# EAGLE board shift controller order (EAGLE 9.2.2), part 1 of 2
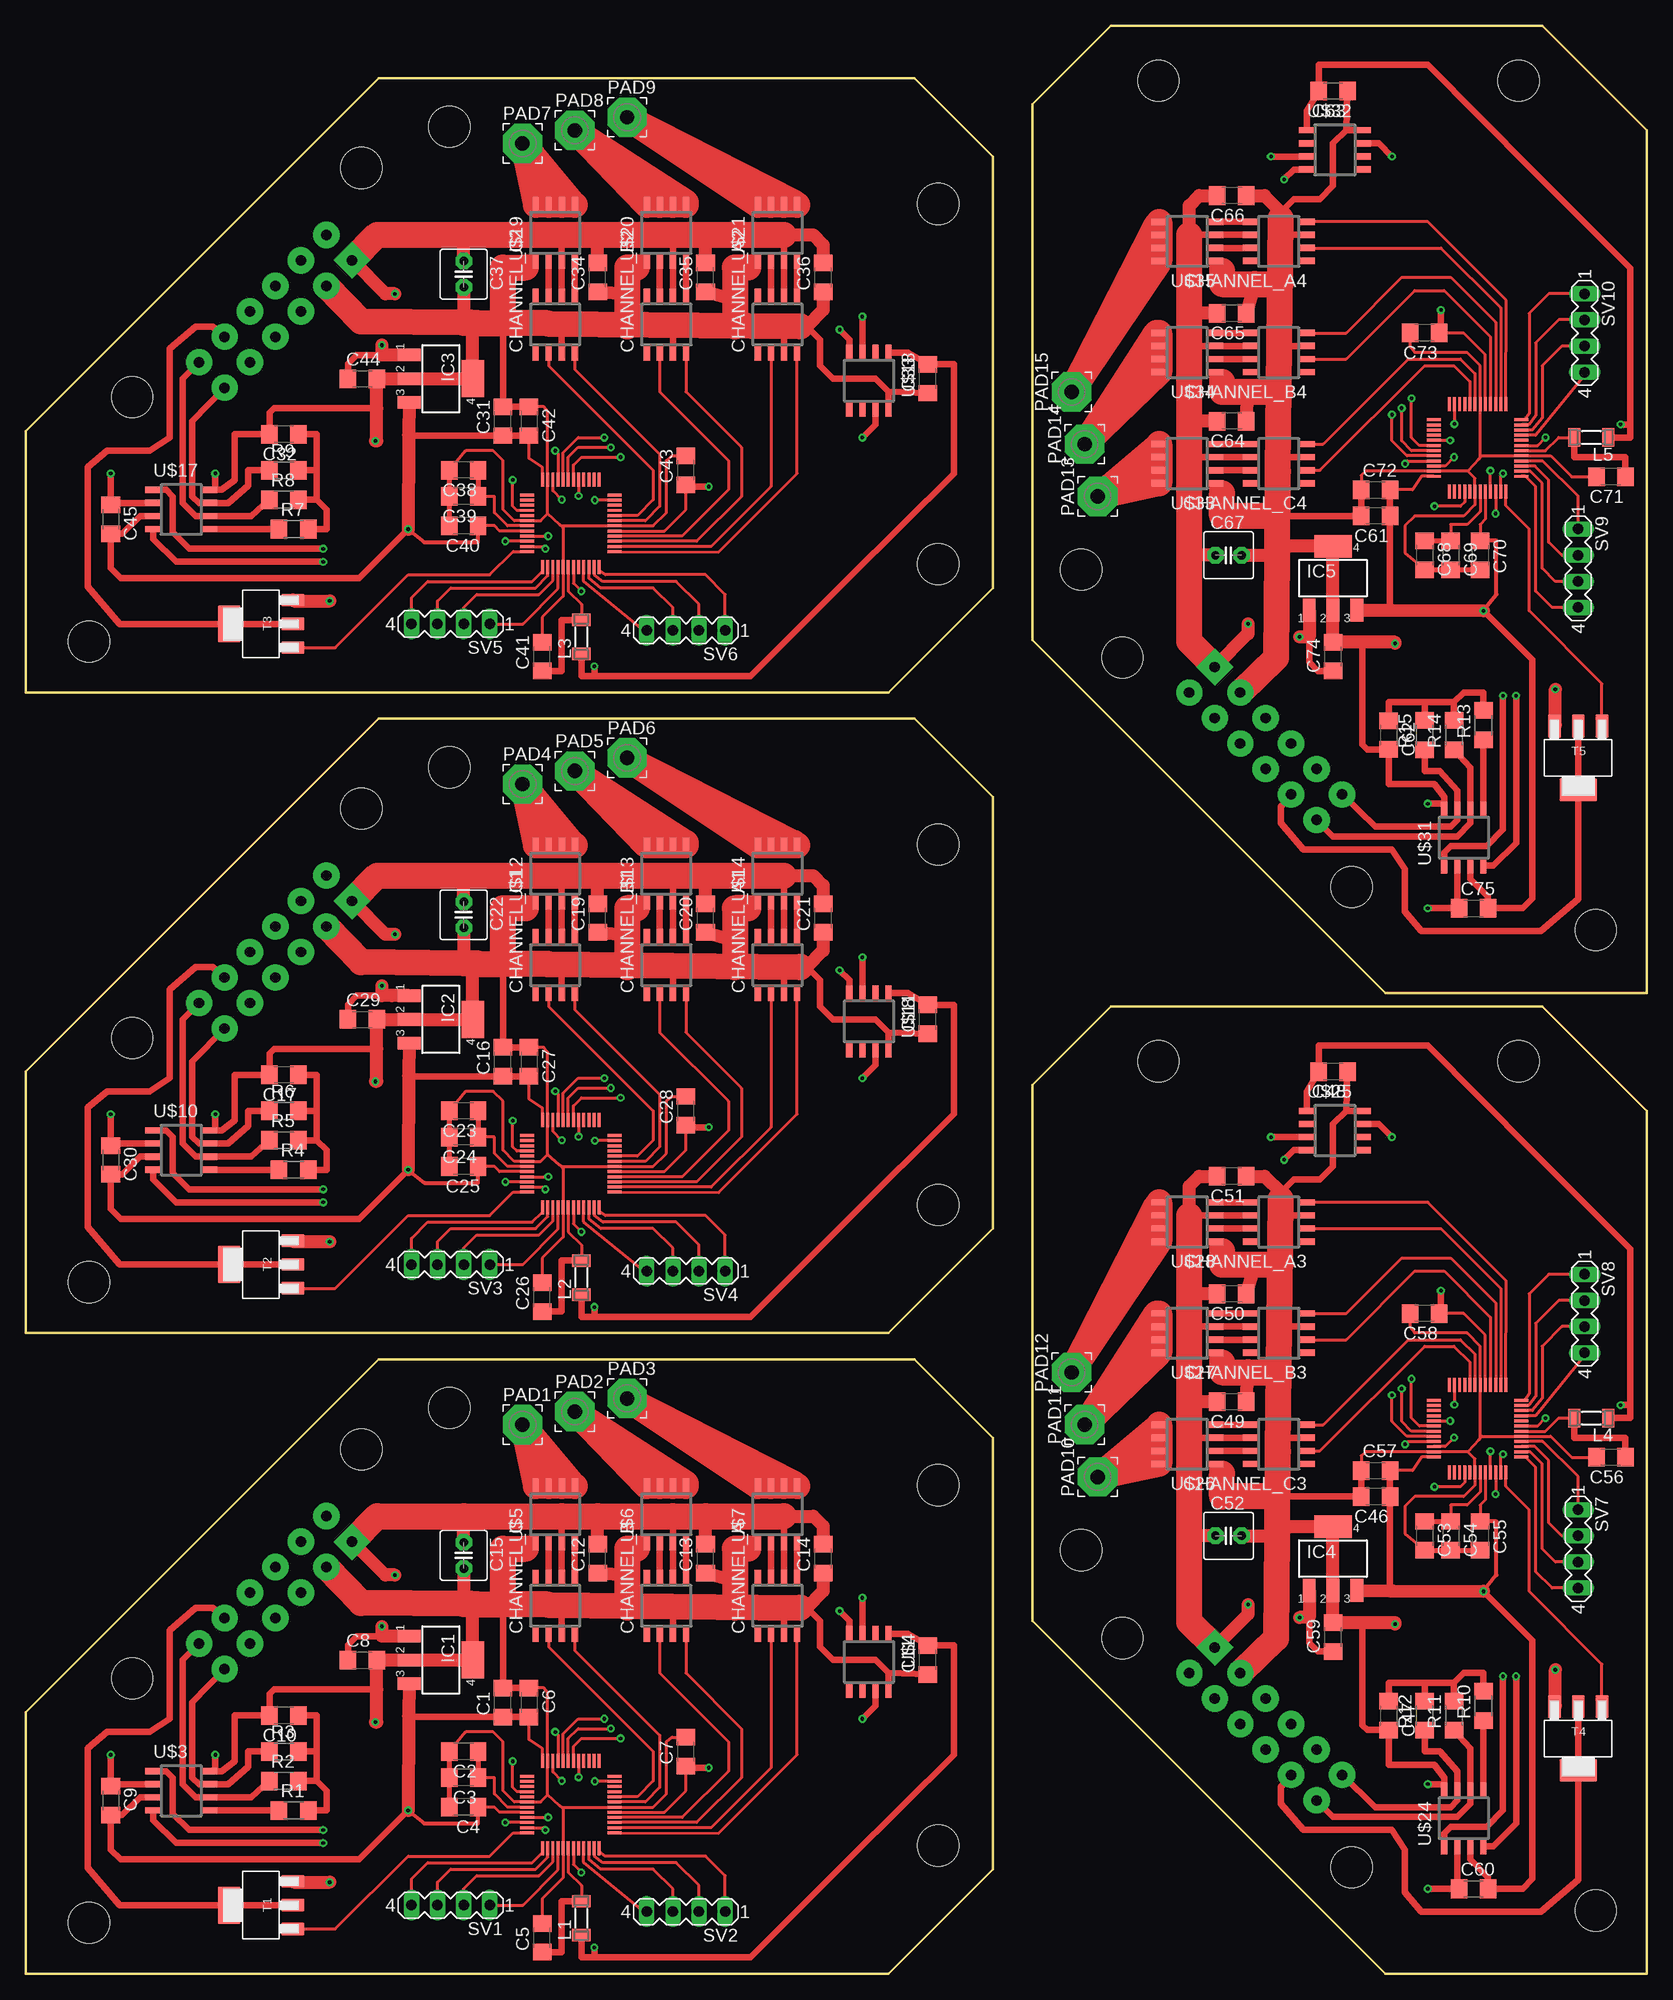
[diagram p0: board, top side]
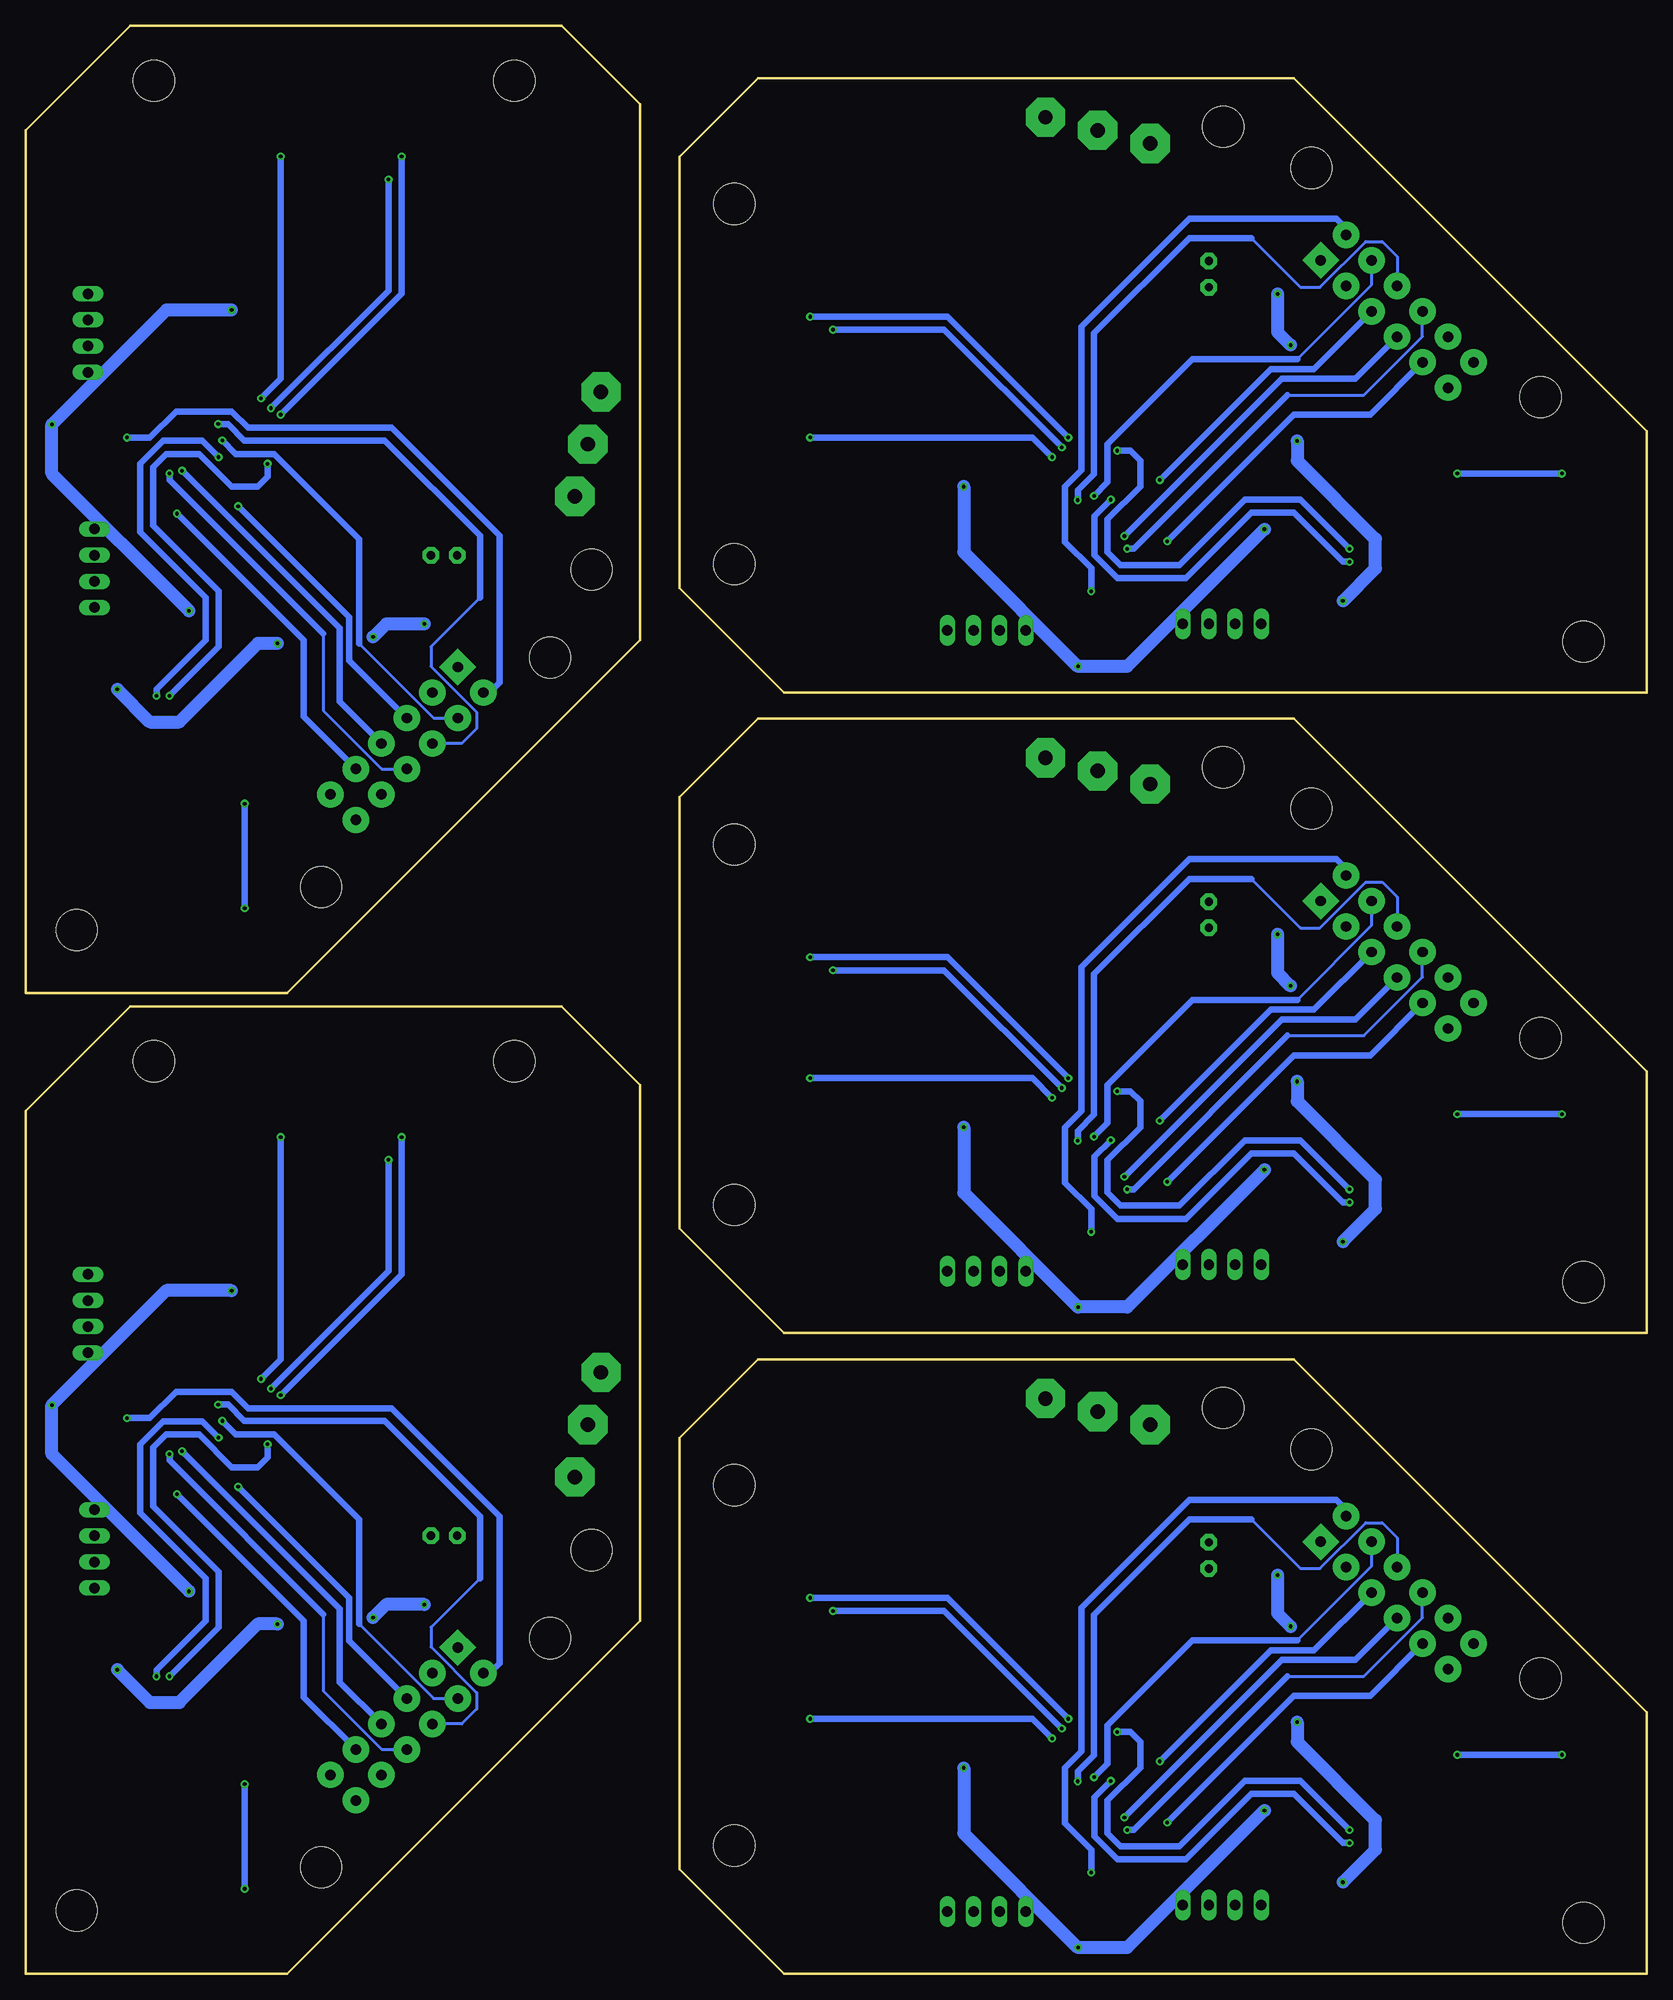
[diagram p1: board, bottom side, seen from below]

Size 157.48 x 189.23 mm. Coordinates in mm from the lower left corner, seen from the top.
Outline: 0,0 83.82,0 93.98,10.16 93.98,52.07 86.36,59.69 34.29,59.69 0,25.4 0,0
Outline: 0,62.23 83.82,62.23 93.98,72.39 93.98,114.3 86.36,121.92 34.29,121.92 0,87.63 0,62.23
Outline: 0,124.46 83.82,124.46 93.98,134.62 93.98,176.53 86.36,184.15 34.29,184.15 0,149.86 0,124.46
Outline: 157.48,0 157.48,83.82 147.32,93.98 105.41,93.98 97.79,86.36 97.79,34.29 132.08,0 157.48,0
Outline: 157.48,95.25 157.48,179.07 147.32,189.23 105.41,189.23 97.79,181.61 97.79,129.54 132.08,95.25 157.48,95.25
Copper layers (1*16): Top 0.035mm / dielectric 1.5mm / Bottom 0.035mm
Design rules "default": minimum track width 6mil, minimum drill 0.35mm, track to track 6mil, track to pad 6mil, pad to pad 6mil, via to via 6mil, smd to smd 6mil, copper to edge 40mil, drill to drill 6mil, minimum pad ring 10mil, minimum via ring 8mil, stop-mask expansion 4mil, vias tented up to drill 0mil, thermal gap 10mil
Holes 4 mm at 88.65,47.46 88.65,12.46 41.15,54.96 6.15,4.96 88.65,109.69 88.65,74.69 41.15,117.19 6.15,67.19 88.65,171.92 88.65,136.92 41.15,179.42 6.15,129.42 110.02,88.65 145.02,88.65 102.52,41.15 152.52,6.15 110.02,183.9 145.02,183.9 102.52,136.4 152.52,101.4
tRestrict: 5 lines

## Footprints (pad centres in the part's own frame; a part is rotated, then mirrored left to right if it is on the bottom)
C1206 = smd 1.6 x 1.8: 1 -1.4,0; 2 1.4,0
C2.5-5 = drill 0.813 pad 1.6 octagon: 1 -1.27,0; 2 1.27,0
SOIC-8 = smd 1.524 x 0.61: 1 0,3.81; 2 0,2.54; 3 0,1.27; 4 0,0; 5 5.461,0; 6 5.461,1.27; 7 5.461,2.54; 8 5.461,3.81
SOT223 = smd 1.219 x 2.235: 1 -2.311,-3.099; 2 0,-3.099; 3 2.311,-3.099 | smd 3.6 x 2.2: 4 0,3.099
SM-1206 = smd 1.2 x 1.8: 1 -1.65,0; 2 1.65,0
3,81/1,4 = drill 1.397 pad 3.81 octagon: 1 0,0
R1206 = smd 1.6 x 1.803: 1 -1.422,0; 2 1.422,0
MA04-1 = drill 1.016 long: 1 -3.81,0; 2 -1.27,0; 3 1.27,0; 4 3.81,0
SOT223' = smd 2.235 x 1.219: 1 -3.099,2.311; 2 -3.099,0; 3 -3.099,-2.311 | smd 2.2 x 3.6: 4 3.099,0
TQFP-48 = smd 1.35 x 0.29: 1 -4,2.5; 2 -4,2; 3 -4,1.5; 4 -4,1; 5 -4,0.5; 6 -4,0; 7 -4,-0.5; 8 -4,-1; 9 -4,-1.5; 10 -4,-2; 11 -4,-2.5; 12 -4,-3; 25 4.5,-3; 26 4.5,-2.5; 27 4.5,-2; 28 4.5,-1.5; 29 4.5,-1; 30 4.5,-0.5; 31 4.5,0; 32 4.5,0.5; 33 4.5,1; 34 4.5,1.5; 35 4.5,2; 36 4.5,2.5 | smd 0.29 x 1.35: 13 -2.5,-4.5; 14 -2,-4.5; 15 -1.5,-4.5; 16 -1,-4.5; 17 -0.5,-4.5; 18 0,-4.5; 19 0.5,-4.5; 20 1,-4.5; 21 1.5,-4.5; 22 2,-4.5; 23 2.5,-4.5; 24 3,-4.5; 37 3,4; 38 2.5,4; 39 2,4; 40 1.5,4; 41 1,4; 42 0.5,4; 43 0,4; 44 -0.5,4; 45 -1,4; 46 -1.5,4; 47 -2,4; 48 -2.5,4
12X3.5PITCH = drill 1 pad 2.54 square: 1 0,3.5 | drill 1 pad 2.54: 2 3.5,3.5; 3 7,3.5; 4 10.5,3.5; 5 14,3.5; 6 17.5,3.5; 7 0,0; 8 3.5,0; 9 7,0; 10 10.5,0; 11 14,0; 12 17.5,0 | hole 3.988: -7,-2.2; 24.5,-2.2

## Placement (x,y rotation side)
C1  10uF  [C1206]  46.35,26.35 90 top
C2  1uF  [C1206]  42.55,21.59 180 top
C3  100nF  [C1206]  42.55,19.05 180 top
C4  100nF  [C1206]  42.55,16.19 180 top
C5  10uF  [C1206]  50.16,3.49 90 top
C6  100nF  [C1206]  48.9,26.35 270 top
C7  100nF  [C1206]  64.14,21.59 90 top
C8  0.22uF  [C1206]  32.7,30.48 0 top
C9  0.1uF  [C1206]  8.26,16.83 270 top
C10  4700pF  [C1206]  25.08,25.08 180 top
C11  100nF  [C1206]  87.63,30.48 90 top
C12  0.5uF  [C1206]  55.56,40.32 90 top
C13  0.5uF  [C1206]  66.04,40.32 90 top
C14  0.5uF  [C1206]  77.47,40.32 90 top
C15  100uF  [C2.5-5]  42.55,40.64 270 top
C16  10uF  [C1206]  46.35,88.58 90 top
C17  4700pF  [C1206]  25.08,87.31 180 top
C18  100nF  [C1206]  87.63,92.71 90 top
C19  0.5uF  [C1206]  55.56,102.55 90 top
C20  0.5uF  [C1206]  66.04,102.55 90 top
C21  0.5uF  [C1206]  77.47,102.55 90 top
C22  100uF  [C2.5-5]  42.55,102.87 270 top
C23  1uF  [C1206]  42.55,83.82 180 top
C24  100nF  [C1206]  42.55,81.28 180 top
C25  100nF  [C1206]  42.55,78.42 180 top
C26  10uF  [C1206]  50.16,65.72 90 top
C27  100nF  [C1206]  48.9,88.58 270 top
C28  100nF  [C1206]  64.14,83.82 90 top
C29  0.22uF  [C1206]  32.7,92.71 0 top
C30  0.1uF  [C1206]  8.26,79.06 270 top
C31  10uF  [C1206]  46.35,150.81 90 top
C32  4700pF  [C1206]  25.08,149.54 180 top
C33  100nF  [C1206]  87.63,154.94 90 top
C34  0.5uF  [C1206]  55.56,164.78 90 top
C35  0.5uF  [C1206]  66.04,164.78 90 top
C36  0.5uF  [C1206]  77.47,164.78 90 top
C37  100uF  [C2.5-5]  42.55,165.1 270 top
C38  1uF  [C1206]  42.55,146.05 180 top
C39  100nF  [C1206]  42.55,143.51 180 top
C40  100nF  [C1206]  42.55,140.65 180 top
C41  10uF  [C1206]  50.16,127.95 90 top
C42  100nF  [C1206]  48.9,150.81 270 top
C43  100nF  [C1206]  64.14,146.05 90 top
C44  0.22uF  [C1206]  32.7,154.94 0 top
C45  0.1uF  [C1206]  8.26,141.29 270 top
C46  10uF  [C1206]  131.13,46.35 180 top
C47  4700pF  [C1206]  132.4,25.08 270 top
C48  100nF  [C1206]  127,87.63 180 top
C49  0.5uF  [C1206]  117.16,55.56 180 top
C50  0.5uF  [C1206]  117.16,66.04 180 top
C51  0.5uF  [C1206]  117.16,77.47 180 top
C52  100uF  [C2.5-5]  116.84,42.55 0 top
C53  1uF  [C1206]  135.89,42.55 270 top
C54  100nF  [C1206]  138.43,42.55 270 top
C55  100nF  [C1206]  141.29,42.55 270 top
C56  10uF  [C1206]  153.99,50.16 180 top
C57  100nF  [C1206]  131.13,48.9 0 top
C58  100nF  [C1206]  135.89,64.14 180 top
C59  0.22uF  [C1206]  127,32.7 90 top
C60  0.1uF  [C1206]  140.65,8.26 0 top
C61  10uF  [C1206]  131.13,141.6 180 top
C62  4700pF  [C1206]  132.4,120.33 270 top
C63  100nF  [C1206]  127,182.88 180 top
C64  0.5uF  [C1206]  117.16,150.81 180 top
C65  0.5uF  [C1206]  117.16,161.29 180 top
C66  0.5uF  [C1206]  117.16,172.72 180 top
C67  100uF  [C2.5-5]  116.84,137.79 0 top
C68  1uF  [C1206]  135.89,137.79 270 top
C69  100nF  [C1206]  138.43,137.79 270 top
C70  100nF  [C1206]  141.29,137.79 270 top
C71  10uF  [C1206]  153.99,145.41 180 top
C72  100nF  [C1206]  131.13,144.15 0 top
C73  100nF  [C1206]  135.89,159.38 180 top
C74  0.22uF  [C1206]  127,127.95 90 top
C75  0.1uF  [C1206]  140.65,103.5 0 top
CHANNEL_A  FAN3278  [SOIC-8]  74.93,33.02 90 top
CHANNEL_A1  FAN3278  [SOIC-8]  74.93,95.25 90 top
CHANNEL_A2  FAN3278  [SOIC-8]  74.93,157.48 90 top
CHANNEL_A3  FAN3278  [SOIC-8]  124.46,74.93 180 top
CHANNEL_A4  FAN3278  [SOIC-8]  124.46,170.18 180 top
CHANNEL_B  FAN3278  [SOIC-8]  64.14,33.02 90 top
CHANNEL_B1  FAN3278  [SOIC-8]  64.14,95.25 90 top
CHANNEL_B2  FAN3278  [SOIC-8]  64.14,157.48 90 top
CHANNEL_B3  FAN3278  [SOIC-8]  124.46,64.14 180 top
CHANNEL_B4  FAN3278  [SOIC-8]  124.46,159.38 180 top
CHANNEL_C  FAN3278  [SOIC-8]  53.34,33.02 90 top
CHANNEL_C1  FAN3278  [SOIC-8]  53.34,95.25 90 top
CHANNEL_C2  FAN3278  [SOIC-8]  53.34,157.48 90 top
CHANNEL_C3  FAN3278  [SOIC-8]  124.46,53.34 180 top
CHANNEL_C4  FAN3278  [SOIC-8]  124.46,148.59 180 top
IC1  LM340S  [SOT223]  40.32,30.48 270 top
IC2  LM340S  [SOT223]  40.32,92.71 270 top
IC3  LM340S  [SOT223]  40.32,154.94 270 top
IC4  LM340S  [SOT223]  127,40.32 0 top
IC5  LM340S  [SOT223]  127,135.57 0 top
L1  [SM-1206]  53.98,5.4 90 top
L2  [SM-1206]  53.98,67.63 90 top
L3  [SM-1206]  53.98,129.86 90 top
L4  [SM-1206]  152.08,53.98 180 top
L5  [SM-1206]  152.08,149.22 180 top
PAD1  [3,81/1,4]  48.26,53.34 0 top
PAD2  [3,81/1,4]  53.34,54.61 0 top
PAD3  [3,81/1,4]  58.42,55.88 0 top
PAD4  [3,81/1,4]  48.26,115.57 0 top
PAD5  [3,81/1,4]  53.34,116.84 0 top
PAD6  [3,81/1,4]  58.42,118.11 0 top
PAD7  [3,81/1,4]  48.26,177.8 0 top
PAD8  [3,81/1,4]  53.34,179.07 0 top
PAD9  [3,81/1,4]  58.42,180.34 0 top
PAD10  [3,81/1,4]  104.14,48.26 90 top
PAD11  [3,81/1,4]  102.87,53.34 90 top
PAD12  [3,81/1,4]  101.6,58.42 90 top
PAD13  [3,81/1,4]  104.14,143.51 90 top
PAD14  [3,81/1,4]  102.87,148.59 90 top
PAD15  [3,81/1,4]  101.6,153.67 90 top
R1  300ohm  [R1206]  26.04,15.88 0 top
R2  60ohm  [R1206]  25.08,18.73 0 top
R3  60ohm  [R1206]  25.08,21.59 0 top
R4  300ohm  [R1206]  26.04,78.11 0 top
R5  60ohm  [R1206]  25.08,80.96 0 top
R6  60ohm  [R1206]  25.08,83.82 0 top
R7  300ohm  [R1206]  26.04,140.34 0 top
R8  60ohm  [R1206]  25.08,143.19 0 top
R9  60ohm  [R1206]  25.08,146.05 0 top
R10  300ohm  [R1206]  141.6,26.04 90 top
R11  60ohm  [R1206]  138.75,25.08 90 top
R12  60ohm  [R1206]  135.89,25.08 90 top
R13  300ohm  [R1206]  141.6,121.28 90 top
R14  60ohm  [R1206]  138.75,120.33 90 top
R15  60ohm  [R1206]  135.89,120.33 90 top
SV1  [MA04-1]  41.27,6.67 180 top
SV2  [MA04-1]  64.14,6.03 180 top
SV3  [MA04-1]  41.27,68.9 180 top
SV4  [MA04-1]  64.14,68.26 180 top
SV5  [MA04-1]  41.27,131.13 180 top
SV6  [MA04-1]  64.14,130.49 180 top
SV7  [MA04-1]  150.81,41.27 270 top
SV8  [MA04-1]  151.45,64.14 270 top
SV9  [MA04-1]  150.81,136.53 270 top
SV10  [MA04-1]  151.45,159.38 270 top
T1  [SOT223']  22.86,6.67 180 top
T2  [SOT223']  22.86,68.9 180 top
T3  [SOT223']  22.86,131.13 180 top
T4  [SOT223']  150.81,22.86 270 top
T5  [SOT223']  150.81,118.11 270 top
U$1  SAMC21(48TQFP)  [TQFP-48]  52.7,16.19 90 top
U$2  MX120SHIFT  [12X3.5PITCH]  29.21,44.45 225 top
U$3  MCP2561FD  [SOIC-8]  12.38,15.88 0 top
U$4  AK7401  [SOIC-8]  80.01,33.02 270 top
U$5  SI4501BDY  [SOIC-8]  53.34,41.91 90 top
U$6  SI4501BDY  [SOIC-8]  64.14,41.91 90 top
U$7  SI4501BDY  [SOIC-8]  74.93,41.91 90 top
U$8  SAMC21(48TQFP)  [TQFP-48]  52.7,78.42 90 top
U$9  MX120SHIFT  [12X3.5PITCH]  29.21,106.68 225 top
U$10  MCP2561FD  [SOIC-8]  12.38,78.11 0 top
U$11  AK7401  [SOIC-8]  80.01,95.25 270 top
U$12  SI4501BDY  [SOIC-8]  53.34,104.14 90 top
U$13  SI4501BDY  [SOIC-8]  64.14,104.14 90 top
U$14  SI4501BDY  [SOIC-8]  74.93,104.14 90 top
U$15  SAMC21(48TQFP)  [TQFP-48]  52.7,140.65 90 top
U$16  MX120SHIFT  [12X3.5PITCH]  29.21,168.91 225 top
U$17  MCP2561FD  [SOIC-8]  12.38,140.34 0 top
U$18  AK7401  [SOIC-8]  80.01,157.48 270 top
U$19  SI4501BDY  [SOIC-8]  53.34,166.37 90 top
U$20  SI4501BDY  [SOIC-8]  64.14,166.37 90 top
U$21  SI4501BDY  [SOIC-8]  74.93,166.37 90 top
U$22  SAMC21(48TQFP)  [TQFP-48]  141.29,52.7 180 top
U$23  MX120SHIFT  [12X3.5PITCH]  113.03,29.21 315 top
U$24  MCP2561FD  [SOIC-8]  141.6,12.38 90 top
U$25  AK7401  [SOIC-8]  124.46,80.01 0 top
U$26  SI4501BDY  [SOIC-8]  115.57,53.34 180 top
U$27  SI4501BDY  [SOIC-8]  115.57,64.14 180 top
U$28  SI4501BDY  [SOIC-8]  115.57,74.93 180 top
U$29  SAMC21(48TQFP)  [TQFP-48]  141.29,147.96 180 top
U$30  MX120SHIFT  [12X3.5PITCH]  113.03,124.46 315 top
U$31  MCP2561FD  [SOIC-8]  141.6,107.63 90 top
U$32  AK7401  [SOIC-8]  124.46,175.26 0 top
U$33  SI4501BDY  [SOIC-8]  115.57,148.59 180 top
U$34  SI4501BDY  [SOIC-8]  115.57,159.38 180 top
U$35  SI4501BDY  [SOIC-8]  115.57,170.18 180 top

## Library data of the parts
C1-C14 C16-C21 C23-C36 C38-C51 C53-C66 C68-C75 = eagle-ltspice; SPICEMODEL: NONE; SPICEPREFIX: C
C15 C22 C37 C52 C67 = capacitor-wima
CHANNEL_A CHANNEL_A1-CHANNEL_A4 CHANNEL_B CHANNEL_B1-CHANNEL_B4 CHANNEL_C CHANNEL_C1-CHANNEL_C4 U$2 U$4-U$7 U$9 U$11-U$14 U$16 U$18-U$21 U$23 U$25-U$28 U$30 U$32-U$35 = my library 2
IC1-IC5 = linear
L1-L5 = inductor-neosid; OC_FARNELL: unknown; OC_NEWARK: unknown
PAD1-PAD15 = wirepad
R1-R15 = eagle-ltspice; SPICEMODEL: NONE; SPICEPREFIX: R
SV1-SV10 = con-lstb; OC_FARNELL: unknown; OC_NEWARK: unknown
T1-T5 = we-transistor
U$1 U$3 U$8 U$10 U$15 U$17 U$22 U$24 U$29 U$31 = my library

## Nets
N$1: U$1.45 U$2.4
N$2: U$1.46 U$2.5
N$3: U$1.34 U$3.4
N$4: U$1.33 U$3.1
N$5: R3.1 U$2.6 U$3.7
N$6: R2.1 U$2.12 U$3.6
N$7: U$1.40 U$2.3
N$8: U$1.7 U$2.7
N$9: U$1.23 U$2.9
N$10: U$1.29 U$2.8
N$11: SV1.4 U$1.1
N$12: C8.1 C12.2 C13.2 C14.2 C15.1 CHANNEL_A.6 CHANNEL_B.6 CHANNEL_C.6 IC1.1 U$2.1 U$5.3 U$6.3 U$7.3
N$13: C1.1 C4.1 C6.2 C7.1 C9.2 C11.2 IC1.3 L1.1 U$1.17 U$1.36 U$1.44 U$3.3 U$4.1
N$14: C2.1 C3.1 U$1.43
N$15: C5.1 L1.2 U$1.6
N$16: R1.1 U$3.5
N$18: C10.1 R1.2 R2.2 R3.2
N$19: CHANNEL_C.2 U$1.20
N$20: U$1.30 U$4.7
N$21: U$1.31 U$4.4
N$22: U$1.32 U$4.3
N$23: T1.2 T1.4 U$2.11
N$24: T1.1 U$1.48
N$25: PAD1.1 U$5.5 U$5.6 U$5.7 U$5.8
N$26: PAD2.1 U$6.5 U$6.6 U$6.7 U$6.8
N$27: PAD3.1 U$7.5 U$7.6 U$7.7 U$7.8
N$28: CHANNEL_C.4 U$1.19
N$29: CHANNEL_C.7 U$5.2
N$30: CHANNEL_C.5 U$5.4
N$31: CHANNEL_B.7 U$6.2
N$32: CHANNEL_B.5 U$6.4
N$33: CHANNEL_A.7 U$7.2
N$34: CHANNEL_A.5 U$7.4
N$35: C1.2 C2.2 C3.2 C4.2 C5.2 C6.1 C7.2 C8.2 C9.1 C10.2 C11.1 C12.1 C13.1 C14.1 C15.2 CHANNEL_A.3 CHANNEL_B.3 CHANNEL_C.3 IC1.2 IC1.4 T1.3 U$1.5 U$1.18 U$1.35 U$1.42 U$2.2 U$3.2 U$3.8 U$4.8 U$5.1 U$6.1 U$7.1
N$36: CHANNEL_B.2 U$1.16
N$37: CHANNEL_B.4 U$1.15
N$38: CHANNEL_A.2 U$1.14
N$39: CHANNEL_A.4 U$1.13
N$40: U$1.47 U$2.10
N$41: SV1.3 U$1.2
N$42: SV1.2 U$1.3
N$43: SV1.1 U$1.4
N$44: SV2.4 U$1.9
N$45: SV2.3 U$1.10
N$46: SV2.2 U$1.11
N$47: SV2.1 U$1.12
N$48: U$8.45 U$9.4
N$51: U$8.46 U$9.5
N$52: U$8.33 U$10.1
N$53: R6.1 U$9.6 U$10.7
N$54: R5.1 U$9.12 U$10.6
N$55: U$8.40 U$9.3
N$56: C16.1 C18.2 C25.1 C27.2 C28.1 C30.2 IC2.3 L2.1 U$8.17 U$8.36 U$8.44 U$10.3 U$11.1
N$57: C23.1 C24.1 U$8.43
N$58: C26.1 L2.2 U$8.6
N$59: U$8.34 U$10.4
N$60: R4.1 U$10.5
N$61: C17.1 R4.2 R5.2 R6.2
N$62: U$8.30 U$11.7
N$63: U$8.31 U$11.4
N$64: U$8.32 U$11.3
N$65: T2.2 T2.4 U$9.11
N$66: T2.1 U$8.48
N$67: PAD4.1 U$12.5 U$12.6 U$12.7 U$12.8
N$68: PAD5.1 U$13.5 U$13.6 U$13.7 U$13.8
N$69: PAD6.1 U$14.5 U$14.6 U$14.7 U$14.8
N$70: C19.2 C20.2 C21.2 C22.1 C29.1 CHANNEL_A1.6 CHANNEL_B1.6 CHANNEL_C1.6 IC2.1 U$9.1 U$12.3 U$13.3 U$14.3
N$71: CHANNEL_C1.7 U$12.2
N$72: CHANNEL_C1.5 U$12.4
N$73: CHANNEL_B1.7 U$13.2
N$74: CHANNEL_B1.5 U$13.4
N$75: CHANNEL_A1.7 U$14.2
N$76: CHANNEL_A1.5 U$14.4
N$77: CHANNEL_C1.2 U$8.20
N$78: CHANNEL_C1.4 U$8.19
N$79: CHANNEL_B1.2 U$8.16
N$80: CHANNEL_B1.4 U$8.15
N$81: CHANNEL_A1.2 U$8.14
N$82: CHANNEL_A1.4 U$8.13
N$83: U$8.7 U$9.7
N$84: U$8.23 U$9.9
N$85: U$8.29 U$9.8
N$86: U$8.47 U$9.10
N$87: SV3.4 U$8.1
N$88: SV3.3 U$8.2
N$89: SV3.2 U$8.3
N$90: SV3.1 U$8.4
N$91: SV4.4 U$8.9
N$92: SV4.3 U$8.10
N$93: SV4.2 U$8.11
N$94: SV4.1 U$8.12
N$97: C16.2 C17.2 C18.1 C19.1 C20.1 C21.1 C22.2 C23.2 C24.2 C25.2 C26.2 C27.1 C28.2 C29.2 C30.1 CHANNEL_A1.3 CHANNEL_B1.3 CHANNEL_C1.3 IC2.2 IC2.4 T2.3 U$8.5 U$8.18 U$8.35 U$8.42 U$9.2 U$10.2 U$10.8 U$11.8 U$12.1 U$13.1 U$14.1
N$99: U$15.45 U$16.4
N$100: U$15.46 U$16.5
N$101: U$15.33 U$17.1
N$102: R9.1 U$16.6 U$17.7
N$103: R8.1 U$16.12 U$17.6
N$104: U$15.40 U$16.3
N$105: C31.1 C33.2 C40.1 C42.2 C43.1 C45.2 IC3.3 L3.1 U$15.17 U$15.36 U$15.44 U$17.3 U$18.1
N$106: C38.1 C39.1 U$15.43
N$107: C41.1 L3.2 U$15.6
N$108: U$15.34 U$17.4
N$109: R7.1 U$17.5
N$110: C32.1 R7.2 R8.2 R9.2
N$111: U$15.30 U$18.7
N$112: U$15.31 U$18.4
N$113: U$15.32 U$18.3
N$114: T3.2 T3.4 U$16.11
N$115: T3.1 U$15.48
N$116: PAD7.1 U$19.5 U$19.6 U$19.7 U$19.8
N$117: PAD8.1 U$20.5 U$20.6 U$20.7 U$20.8
N$118: PAD9.1 U$21.5 U$21.6 U$21.7 U$21.8
N$119: C34.2 C35.2 C36.2 C37.1 C44.1 CHANNEL_A2.6 CHANNEL_B2.6 CHANNEL_C2.6 IC3.1 U$16.1 U$19.3 U$20.3 U$21.3
N$120: CHANNEL_C2.7 U$19.2
N$121: CHANNEL_C2.5 U$19.4
N$122: CHANNEL_B2.7 U$20.2
N$123: CHANNEL_B2.5 U$20.4
N$124: CHANNEL_A2.7 U$21.2
N$125: CHANNEL_A2.5 U$21.4
N$126: CHANNEL_C2.2 U$15.20
N$127: CHANNEL_C2.4 U$15.19
N$128: CHANNEL_B2.2 U$15.16
N$129: CHANNEL_B2.4 U$15.15
N$130: CHANNEL_A2.2 U$15.14
N$131: CHANNEL_A2.4 U$15.13
N$132: U$15.7 U$16.7
N$133: U$15.23 U$16.9
N$134: U$15.29 U$16.8
N$135: U$15.47 U$16.10
N$136: SV5.4 U$15.1
N$137: SV5.3 U$15.2
N$138: SV5.2 U$15.3
N$139: SV5.1 U$15.4
N$140: SV6.4 U$15.9
N$141: SV6.3 U$15.10
N$142: SV6.2 U$15.11
N$143: SV6.1 U$15.12
N$146: C31.2 C32.2 C33.1 C34.1 C35.1 C36.1 C37.2 C38.2 C39.2 C40.2 C41.2 C42.1 C43.2 C44.2 C45.1 CHANNEL_A2.3 CHANNEL_B2.3 CHANNEL_C2.3 IC3.2 IC3.4 T3.3 U$15.5 U$15.18 U$15.35 U$15.42 U$16.2 U$17.2 U$17.8 U$18.8 U$19.1 U$20.1 U$21.1
N$148: U$22.45 U$23.4
N$149: U$22.46 U$23.5
N$150: U$22.33 U$24.1
N$151: R12.1 U$23.6 U$24.7
N$152: R11.1 U$23.12 U$24.6
N$153: U$22.40 U$23.3
N$154: C46.1 C48.2 C55.1 C57.2 C58.1 C60.2 IC4.3 L4.1 U$22.17 U$22.36 U$22.44 U$24.3 U$25.1
N$155: C53.1 C54.1 U$22.43
N$156: C56.1 L4.2 U$22.6
N$157: U$22.34 U$24.4
N$158: R10.1 U$24.5
N$159: C47.1 R10.2 R11.2 R12.2
N$160: U$22.30 U$25.7
N$161: U$22.31 U$25.4
N$162: U$22.32 U$25.3
N$163: T4.2 T4.4 U$23.11
N$164: T4.1 U$22.48
N$165: PAD10.1 U$26.5 U$26.6 U$26.7 U$26.8
N$166: PAD11.1 U$27.5 U$27.6 U$27.7 U$27.8
N$167: PAD12.1 U$28.5 U$28.6 U$28.7 U$28.8
N$168: C49.2 C50.2 C51.2 C52.1 C59.1 CHANNEL_A3.6 CHANNEL_B3.6 CHANNEL_C3.6 IC4.1 U$23.1 U$26.3 U$27.3 U$28.3
N$169: CHANNEL_C3.7 U$26.2
N$170: CHANNEL_C3.5 U$26.4
N$171: CHANNEL_B3.7 U$27.2
N$172: CHANNEL_B3.5 U$27.4
N$173: CHANNEL_A3.7 U$28.2
N$174: CHANNEL_A3.5 U$28.4
N$175: CHANNEL_C3.2 U$22.20
N$176: CHANNEL_C3.4 U$22.19
N$177: CHANNEL_B3.2 U$22.16
N$178: CHANNEL_B3.4 U$22.15
N$179: CHANNEL_A3.2 U$22.14
N$180: CHANNEL_A3.4 U$22.13
N$181: U$22.7 U$23.7
N$182: U$22.23 U$23.9
N$183: U$22.29 U$23.8
N$184: U$22.47 U$23.10
N$185: SV7.4 U$22.1
N$186: SV7.3 U$22.2
N$187: SV7.2 U$22.3
N$188: SV7.1 U$22.4
N$189: SV8.4 U$22.9
N$190: SV8.3 U$22.10
N$191: SV8.2 U$22.11
N$192: SV8.1 U$22.12
N$195: C46.2 C47.2 C48.1 C49.1 C50.1 C51.1 C52.2 C53.2 C54.2 C55.2 C56.2 C57.1 C58.2 C59.2 C60.1 CHANNEL_A3.3 CHANNEL_B3.3 CHANNEL_C3.3 IC4.2 IC4.4 T4.3 U$22.5 U$22.18 U$22.35 U$22.42 U$23.2 U$24.2 U$24.8 U$25.8 U$26.1 U$27.1 U$28.1
N$197: U$29.45 U$30.4
N$198: U$29.46 U$30.5
N$199: U$29.33 U$31.1
N$200: R15.1 U$30.6 U$31.7
N$201: R14.1 U$30.12 U$31.6
N$202: U$29.40 U$30.3
N$203: C61.1 C63.2 C70.1 C72.2 C73.1 C75.2 IC5.3 L5.1 U$29.17 U$29.36 U$29.44 U$31.3 U$32.1
N$204: C68.1 C69.1 U$29.43
N$205: C71.1 L5.2 U$29.6
N$206: U$29.34 U$31.4
N$207: R13.1 U$31.5
N$208: C62.1 R13.2 R14.2 R15.2
N$209: U$29.30 U$32.7
N$210: U$29.31 U$32.4
N$211: U$29.32 U$32.3
N$212: T5.2 T5.4 U$30.11
N$213: T5.1 U$29.48
N$214: PAD13.1 U$33.5 U$33.6 U$33.7 U$33.8
N$215: PAD14.1 U$34.5 U$34.6 U$34.7 U$34.8
N$216: PAD15.1 U$35.5 U$35.6 U$35.7 U$35.8
N$217: C64.2 C65.2 C66.2 C67.1 C74.1 CHANNEL_A4.6 CHANNEL_B4.6 CHANNEL_C4.6 IC5.1 U$30.1 U$33.3 U$34.3 U$35.3
N$218: CHANNEL_C4.7 U$33.2
N$219: CHANNEL_C4.5 U$33.4
N$220: CHANNEL_B4.7 U$34.2
N$221: CHANNEL_B4.5 U$34.4
N$222: CHANNEL_A4.7 U$35.2
N$223: CHANNEL_A4.5 U$35.4
N$224: CHANNEL_C4.2 U$29.20
N$225: CHANNEL_C4.4 U$29.19
N$226: CHANNEL_B4.2 U$29.16
N$227: CHANNEL_B4.4 U$29.15
N$228: CHANNEL_A4.2 U$29.14
N$229: CHANNEL_A4.4 U$29.13
N$230: U$29.7 U$30.7
N$231: U$29.23 U$30.9
N$232: U$29.29 U$30.8
N$233: U$29.47 U$30.10
N$234: SV9.4 U$29.1
N$235: SV9.3 U$29.2
N$236: SV9.2 U$29.3
N$237: SV9.1 U$29.4
N$238: SV10.4 U$29.9
N$239: SV10.3 U$29.10
N$240: SV10.2 U$29.11
N$241: SV10.1 U$29.12
N$244: C61.2 C62.2 C63.1 C64.1 C65.1 C66.1 C67.2 C68.2 C69.2 C70.2 C71.2 C72.1 C73.2 C74.2 C75.1 CHANNEL_A4.3 CHANNEL_B4.3 CHANNEL_C4.3 IC5.2 IC5.4 T5.3 U$29.5 U$29.18 U$29.35 U$29.42 U$30.2 U$31.2 U$31.8 U$32.8 U$33.1 U$34.1 U$35.1